# Altium PCB Arena2.1.PcbDoc
Units mm, origin at the board's own origin, x right, y up, seen from the top; angles counter-clockwise.
Board outline 78.11 x 75.18 mm, 2 copper layers (Top Layer, Bottom Layer); 17 components, 25 nets, 153 pads, 5 vias.
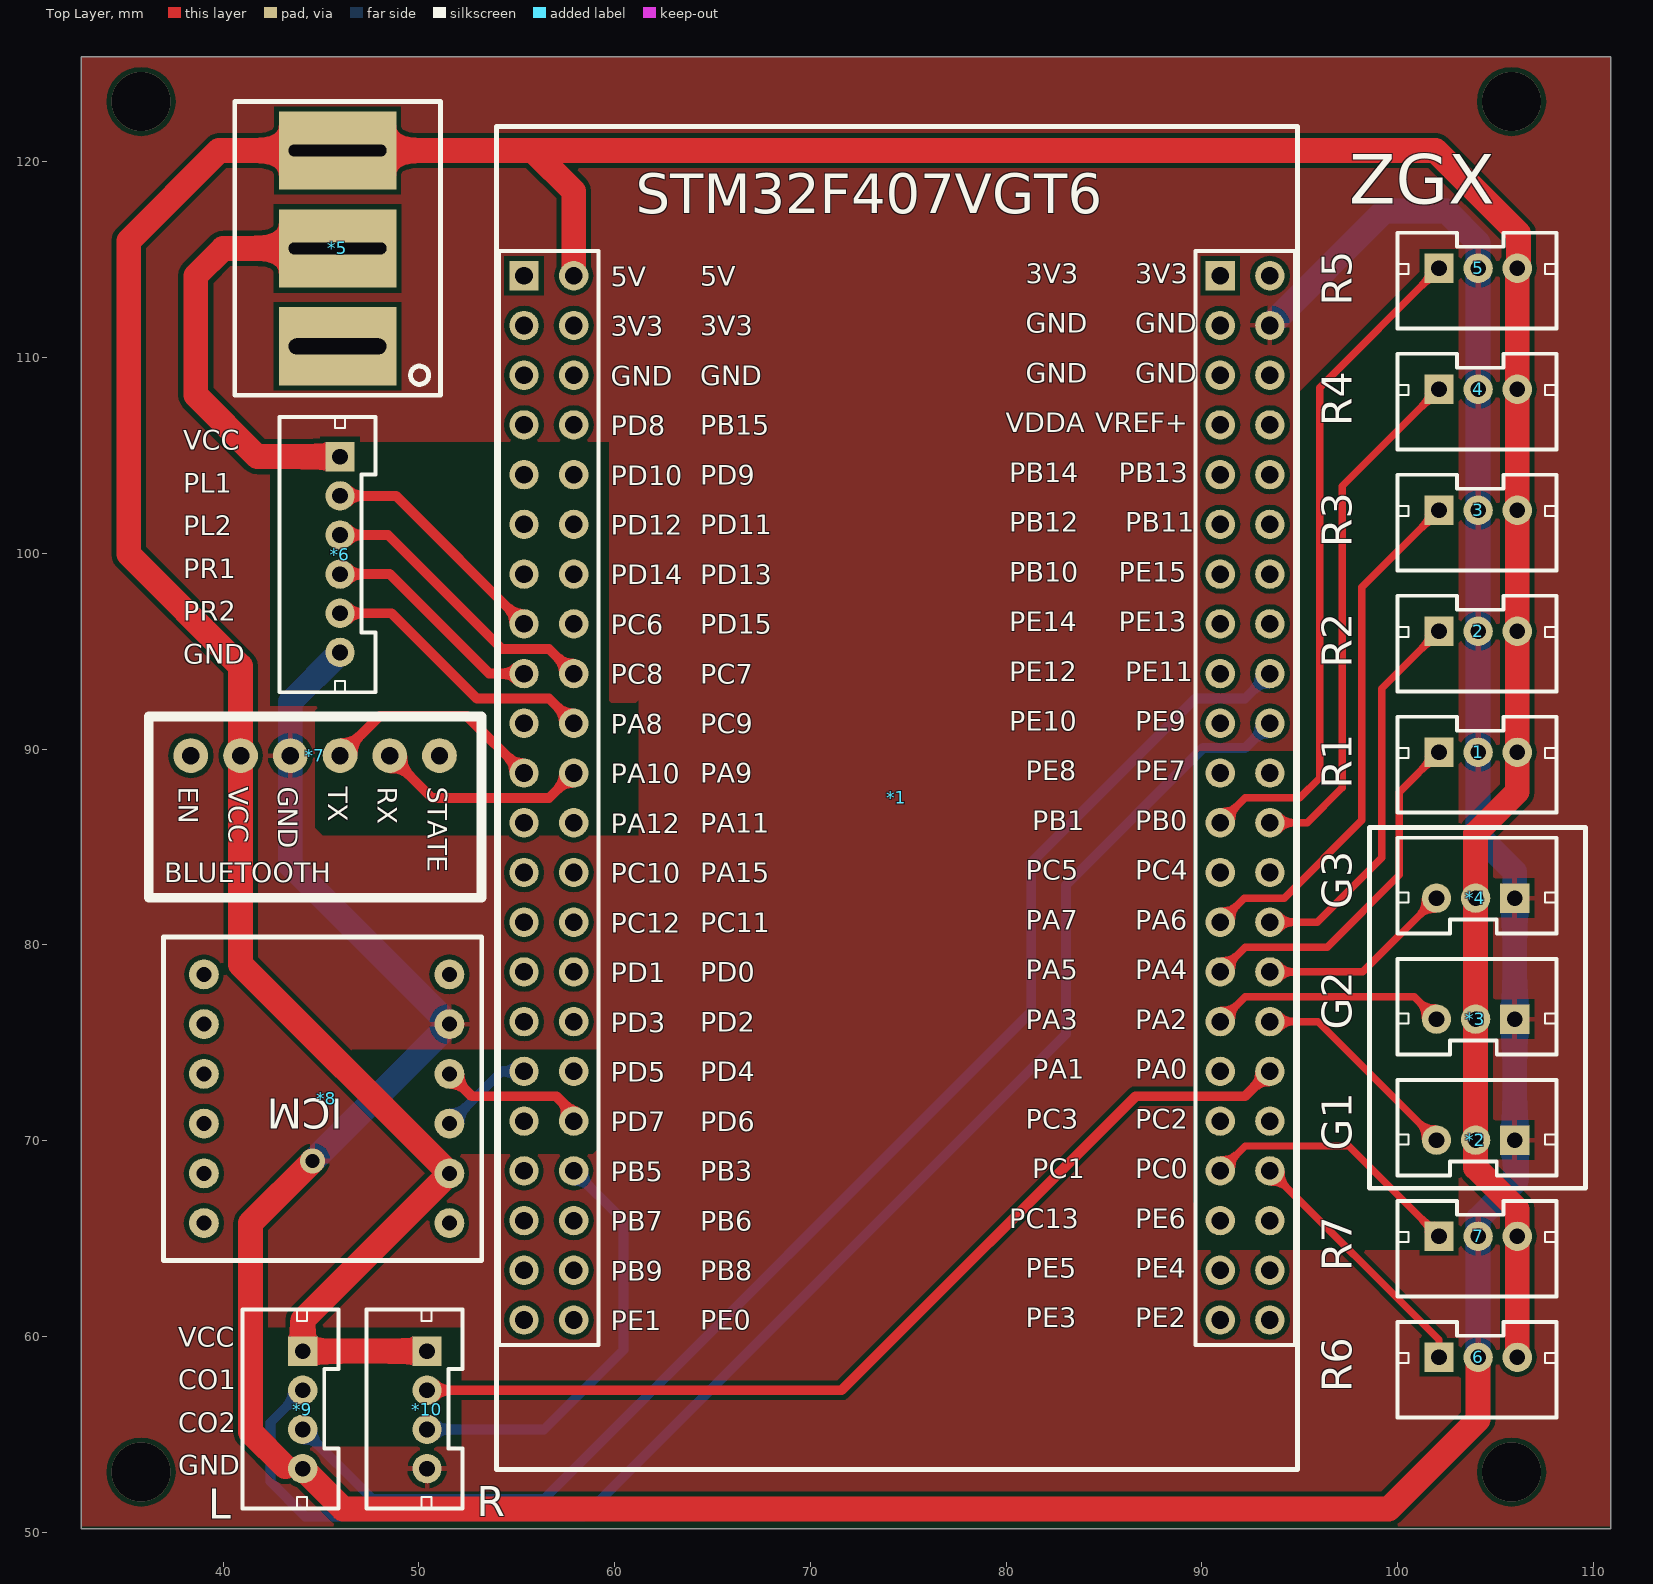
[diagram p0: Top Layer view]
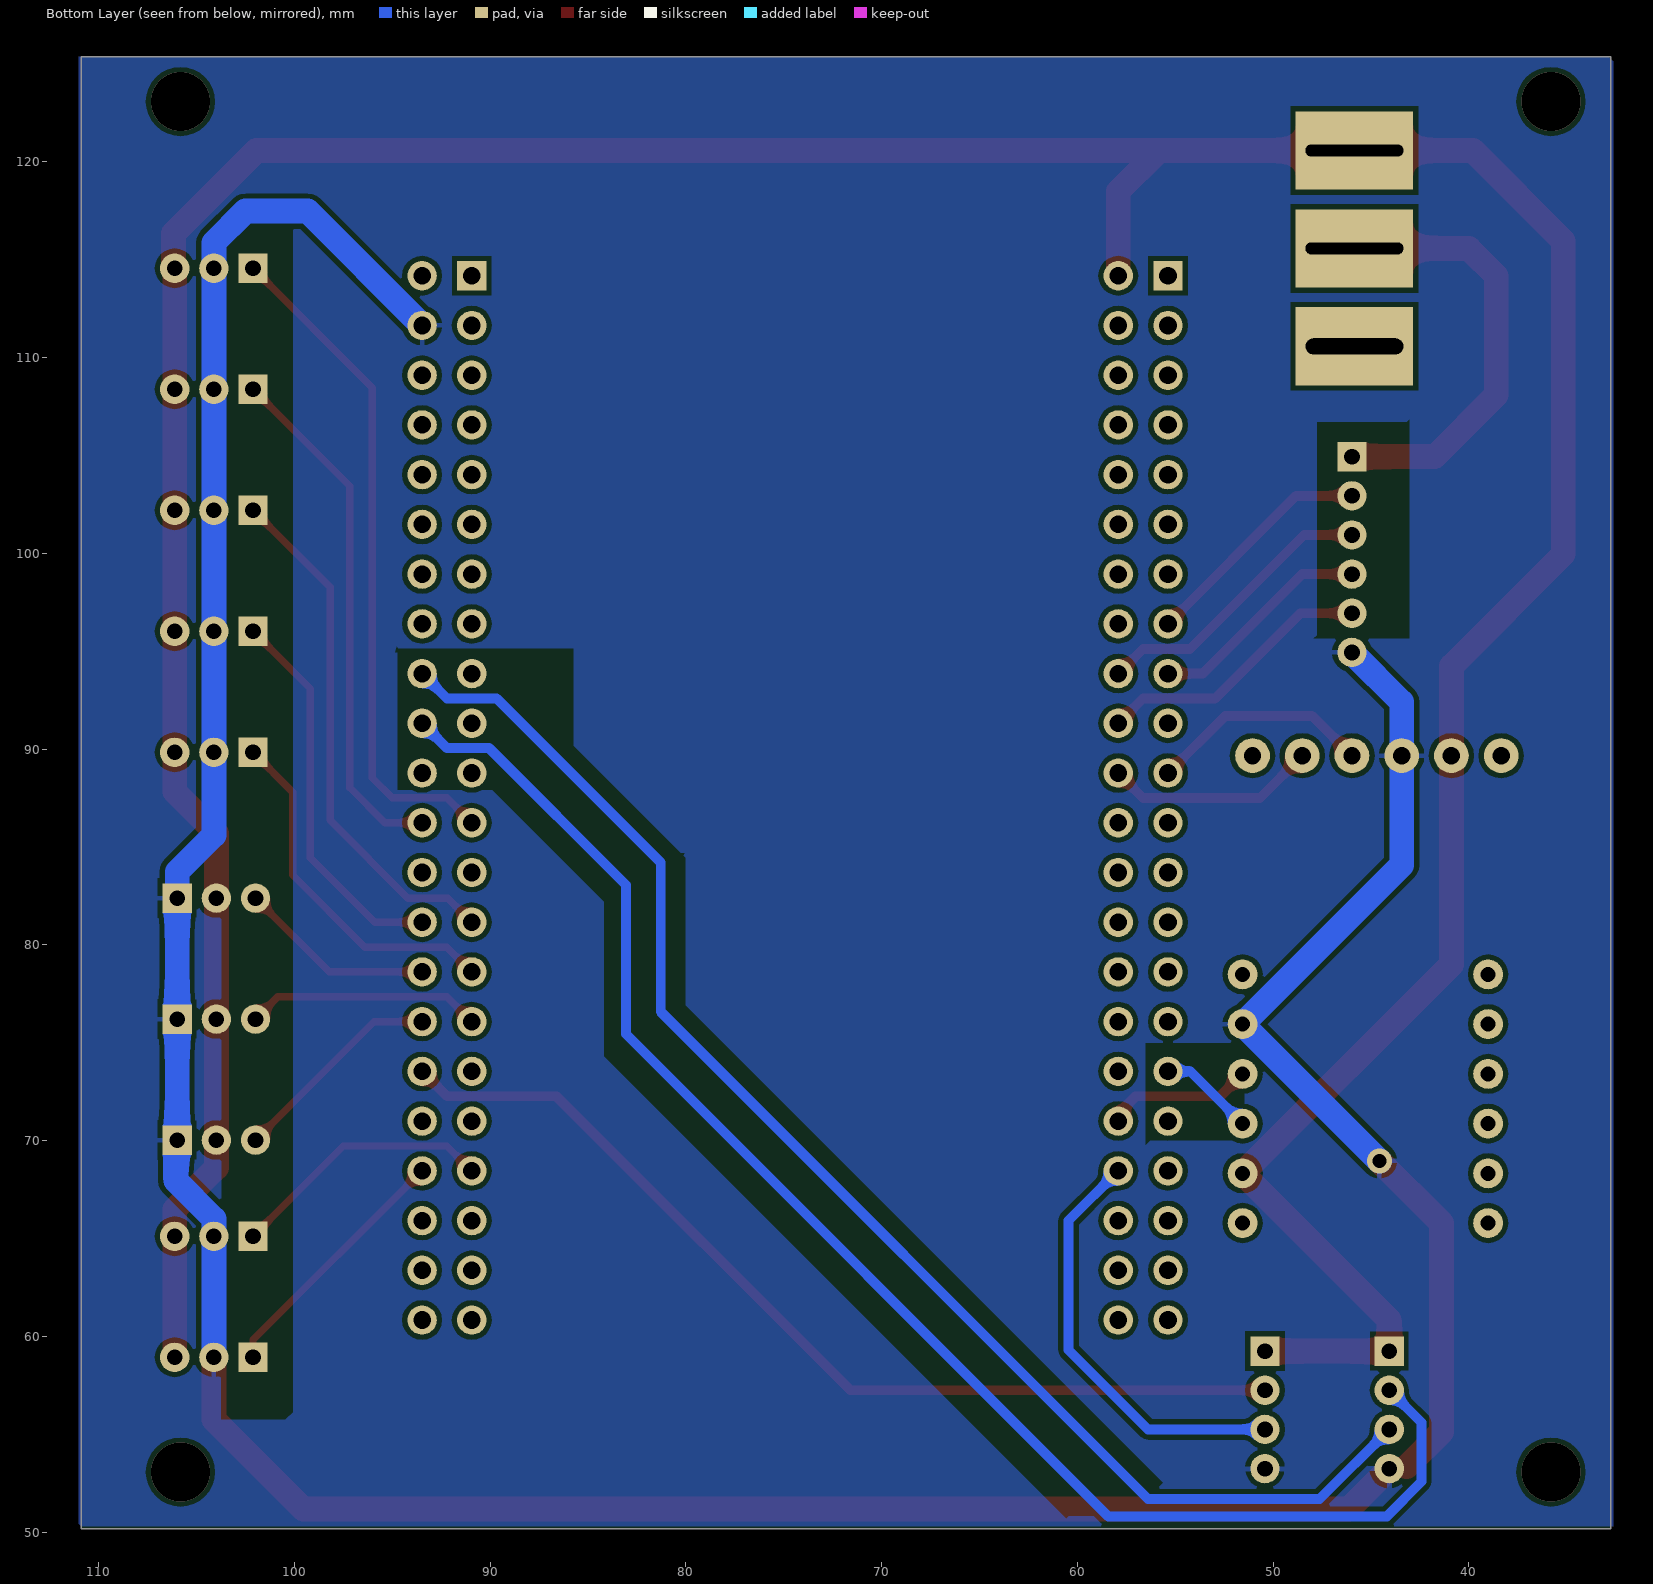
[diagram p1: Bottom Layer view, seen from below]

## Layer stack, top to bottom
Top Solder: solder mask 0.0102, Solder Resist, Dk 3.5
Top Layer: signal copper 0.0356
Dielectric 1: dielectric 0.32, FR-4, Dk 4.8
Bottom Layer: signal copper 0.0356
Bottom Solder: solder mask 0.0102, Solder Resist, Dk 3.5

## Board outline
32.766,81.026 32.766,125.349 110.871,125.349 110.871,50.165 32.766,50.165

## Design rules (kind name [scope] priority, off if disabled: settings)
Clearance [All] p1: gap=0.254 ignorepadtopadclearanceinfootprint=FALSE except(0: Arc-Hole Track-Hole SMDPad-Hole THPad-Hole Via-Hole Fill-Hole Poly-Hole Region-Hole Text-Hole)
PolygonConnect [All] p1: connectstyle=Relief reliefconductorwidth=0.254 reliefentries=4 polygonreliefangle="90 Angle" airgapwidth=0.254
RoutingVias [All] p1: holewidth=0.711 width=1.27 viastyle="Through Hole" minholewidth=0.711 minwidth=1.27 maxholewidth=0.711 maxwidth=1.27
SolderMaskExpansion [All] p1: expansion=0.102
Width [All] p1: maxlimit=254 minlimit=0.254 preferedwidth=0.254 toplayer_maxwidth=25.4 minimp=50.000000 maximp=50.000000 favimp=50.000000
30 further rules are at their usual default settings.

## Components (designator, comment, footprint, x,y, rotation, side; value= is the part's Value field where it differs from the comment)
1 "RANGING" PH2.0-L-Z-3P 102.108,89.831 r0 top
2 "RANGING" PH2.0-L-Z-3P 102.108,96.012 r0 top
3 "RANGING" PH2.0-L-Z-3P 102.108,102.193 r0 top
4 "RANGING" PH2.0-L-Z-3P 102.108,108.373 r0 top
5 "RANGING" PH2.0-L-Z-3P 102.108,114.554 r0 top
6 "RANGING" PH2.0-L-Z-3P 102.108,58.928 r0 top
7 "RANGING" PH2.0-L-Z-3P 102.108,65.109 r0 top
*1 "STM32F407VGT6" STM32F407VGT6 200.386,70.759 r0 top
*2 "Grayscale" PH2.0-L-Z-3P 105.98,70.021 r180 top
*3 "Grayscale" PH2.0-L-Z-3P 105.98,76.202 r180 top
*4 "Grayscale" PH2.0-L-Z-3P 105.98,82.383 r180 top
*5 "kaiguan" kaiguan 10.211,171.501 r180 top
*6 "MOTOR" PH2.0-L-Z-6P 45.974,104.933 r270 top
*7 "BLUETOOTH_1" bluetooth 9.093,63.576 r270 top
*8 "ICM" ICM 47.244,68.072 r180 top
*9 "ENCODE" PH2.0-L-Z-4P 44.069,59.245 r270 top
*10 "ENCODE" PH2.0-L-Z-4P 50.419,59.245 r270 top

## Footprints (in the part's own frame and the unit in brackets; to place one, negate y for a bottom-side part, rotate by r counter-clockwise, add the part's x,y. Pads: shape width x height; smd on the part's side, far side on the other; paste and mask are expansions set on the pad)
bluetooth [mil]
  round 70 hole 35: 1(-1027,1152) 2(-1027,1252) 3(-1027,1352) 4(-1027,1452) 5(-1027,1552) 6(-1027,1652)
  silkscreen extent -1106,1067 -741,1737
ICM [mil]
  round 60 hole 30: 1(-170,90) 2(-170,-10) 3(-170,-110) 4(-170,-210) 5(-170,-310) 6(-170,-410) 7(323.7,-410) 8(323.7,-310) 9(323.7,-210) 10(323.7,-110) 11(323.7,-10) 12(323.7,90)
  silkscreen extent -235,-485 405,165
kaiguan [mm]
  rect 6x4 hole 0.8 slot 5 at 0 deg: 1(-35.636,60.931)
  rect 6x4 hole 0.6 slot 5 at 0 deg: 2(-35.636,55.931) 3(-35.636,50.931)
  silkscreen extent -40.89,48.43 -30.39,63.43
PH2.0-L-Z-3P [mm] "PH2.0 3P立式直插 间距2mm        淘宝ID:黄晶宝石"
  rect 1.5x1.5 hole 0.8: 1(0,0)
  round 1.5 hole 0.8: 2(2,0) 3(4,0)
  silkscreen extent -2.13,-3.08 6,1.82, body extent -1.95,-3 5.95,1.7, height 6
PH2.0-L-Z-4P [mm] "PH2.0 4P立式直插 间距2mm        淘宝ID:黄晶宝石"
  rect 1.5x1.5 hole 0.8: 1(0,0)
  round 1.5 hole 0.8: 2(2,0) 3(4,0) 4(6,0)
  silkscreen extent -2.13,-3.08 8.03,1.82, body extent -1.98,-3 7.92,1.7, height 6
PH2.0-L-Z-6P [mm] "PH2.0 6P立式直插 间距2mm        淘宝ID:黄晶宝石"
  rect 1.5x1.5 hole 0.8: 1(0,0)
  round 1.5 hole 0.8: 2(2,0) 3(4,0) 4(6,0) 5(8,0) 6(10,0)
  silkscreen extent -2.03,-3.08 12.03,1.82, body extent -2,-2.92 11.9,1.78, height 6
STM32F407VGT6 [mm]
  round 1.5 hole 0.9: 1(-106.914,43.414) 2(-106.914,40.874) 3(-106.914,38.334) 4(-106.914,35.794) 5(-106.914,33.254) 6(-106.914,30.714) 7(-106.914,28.174) 8(-106.914,25.634) 9(-106.914,23.094) 10(-106.914,20.554) 11(-106.914,18.014) 12(-106.914,15.474) 13(-106.914,12.934) 14(-106.914,10.394) 15(-106.914,7.854) 16(-106.914,5.314) 17(-106.914,2.774) 18(-106.914,0.234) 19(-106.914,-2.306) 20(-106.914,-4.846) 21(-106.914,-7.386) 22(-106.914,-9.926) 23(-109.454,-9.926) 24(-109.454,-7.386) 25(-109.454,-4.846) 26(-109.454,-2.306) 27(-109.454,0.234) 28(-109.454,2.774) 29(-109.454,5.314) 30(-109.454,7.854) 31(-109.454,10.394) 32(-109.454,12.934) 33(-109.454,15.474) 34(-109.454,18.014) 35(-109.454,20.554) 36(-109.454,23.094) 37(-109.454,25.634) 38(-109.454,28.174) 39(-109.454,30.714) 40(-109.454,33.254) 41(-109.454,35.794) 42(-109.454,38.334) 43(-109.454,40.874) 46(-145.014,40.874) 47(-145.014,38.334) 48(-145.014,35.794) 49(-145.014,33.254) 50(-145.014,30.714) 51(-145.014,28.174) 52(-145.014,25.634) 53(-145.014,23.094) 54(-145.014,20.554) 55(-145.014,18.014) 56(-145.014,15.474) 57(-145.014,12.934) 58(-145.014,10.394) 59(-145.014,7.854) 60(-145.014,5.314) 61(-145.014,2.774) 62(-145.014,0.234) 63(-145.014,-2.306) 64(-145.014,-4.846) 65(-145.014,-7.386) 66(-145.014,-9.926) 67(-142.474,-9.926) 68(-142.474,-7.386) 69(-142.474,-4.846) 70(-142.474,-2.306) 71(-142.474,0.234) 72(-142.474,2.774) 73(-142.474,5.314) 74(-142.474,7.854) 75(-142.474,10.394) 76(-142.474,12.934) 77(-142.474,15.474) 78(-142.474,18.014) 79(-142.474,20.554) 80(-142.474,23.094) 81(-142.474,25.634) 82(-142.474,28.174) 83(-142.474,30.714) 84(-142.474,33.254) 85(-142.474,35.794) 86(-142.474,38.334) 87(-142.474,40.874) 88(-142.474,43.414)
  rect 1.5x1.5 hole 0.9: 44(-109.454,43.414) 45(-145.014,43.414)
  silkscreen extent -146.41,-17.55 -105.52,51.04, body extent -143.51,59.94 -143.51,59.94, height 0.25

## Via types
v1: diameter 3, hole 3, Top Layer to Bottom Layer, 4 vias
v2: diameter 1.27, hole 0.711, Top Layer to Bottom Layer, tented both sides, 1 vias

## Nets (pads, with @x,y where several pads share a name; then routed paths per layer and width w, separated by ;. In a path a pad name is that pad's centre, name@x,y a point inside that pad or via, vN(x,y) a via of type N, cw(c..) or ccw(c..) an arc to the next point about the centre after c; other vN are vias at no path point)
5V: 1.3 2.3 3.3 4.3 5.3 6.3 7.3 *1.88 *2.2 *3.2 *4.2 *5.3 *7.2 *8.2 *9.1 *10.1 | length 214.1
  Top Layer w1.27: *10.1 *9.1 44.069,60.833 *8.2 40.894,78.994 *7.2 40.894,94.234 35.179,99.949 35.179,115.951 39.798,120.57 *5.3 55.833,120.57 ; *1.88 57.912,118.491 55.833,120.57 ; 6.3 7.3 106.108,66.485 103.98,68.613 *2.2 *3.2 *4.2 103.98,85.692 106.108,87.82 1.3 2.3 3.3 4.3 5.3 106.172,114.618 106.172,116.332 101.934,120.57 55.833,120.57
BT_RX: *1.78 *7.5 | length 10.8
  Top Layer w0.508: *7.5 50.673,87.503 56.642,87.503 *1.78
BT_TX: *1.55 *7.4 | length 11.4
  Top Layer w0.508: *7.4 48.006,91.694 52.451,91.694 *1.55
Encode_L1: *1.10 *9.2 | length 78.4
  Bottom Layer w0.508: *9.2 42.418,55.594 42.418,52.578 44.196,50.8 58.42,50.8 83.058,75.438 83.058,83.058 90.043,90.043 92.202,90.043 *1.10
Encode_L2: *1.9 *9.3 | length 72.8
  Bottom Layer w0.508: *9.3 47.625,51.689 56.388,51.689 81.28,76.581 81.28,84.201 89.662,92.583 92.202,92.583 *1.9
Encode_R1: *1.17 *10.2 | length 49.8
  Top Layer w0.508: *10.2 71.596,57.245 86.614,72.263 92.202,72.263 *1.17
Encode_R2: *1.70 *10.3 | length 21.9
  Bottom Layer w0.508: *10.3 56.388,55.245 60.452,59.309 60.452,65.913 *1.70
GND: 1.2 2.2 3.2 4.2 5.2 6.2 7.2 *1.2 *2.1 *3.1 *4.1 *6.6 *7.3 *8.5 *9.4 *10.4 | length 189.2
  Top Layer w1.27: 43.18,53.34 41.402,55.118 41.402,65.786 v2(44.577,68.961) ; *9.4 46.133,51.181 99.536,51.181 104.108,55.753 6.2
  Bottom Layer w1.27: v2(44.577,68.961) *8.5 43.434,84.074 *7.3 43.434,92.393 *6.6 ; *1.2 99.314,117.475 102.489,117.475 104.108,115.856 5.2 4.2 3.2 2.2 1.2 104.108,85.598 105.98,83.726 *4.1 *3.1 *2.1 106.045,69.956 106.045,67.945 104.108,66.008 7.2 6.2
Gray1: *1.16 *2.3 | length 11
  Top Layer w0.381: *1.16 95.928,76.073 *2.3
Gray2: *1.29 *3.3 | length 12
  Top Layer w0.381: *1.29 92.202,77.343 100.839,77.343 *3.3
Gray3: *1.15 *4.3 | length 10.1
  Top Layer w0.381: *1.15 98.21,78.613 *4.3
ICM_RX: *1.61 *8.3 | length 4.9
  Bottom Layer w0.508: *8.3 54.229,73.533 *1.61
ICM_TX: *1.71 *8.4 | length 7.6
  Top Layer w0.508: *8.4 52.705,72.263 57.023,72.263 57.912,71.374 *1.71
Net*5_2: *5.2 *6.1 | length 22.6
  Top Layer w1.27: *5.2 40.005,115.57 38.608,114.173 38.608,108.077 41.752,104.933 *6.1
PWM_L1: *1.52 *6.2 | length 12.1
  Top Layer w0.508: *6.2 48.832,102.933 *1.52
PWM_L2: *1.80 *6.3 | length 14.9
  Top Layer w0.508: *6.3 48.419,100.933 54.241,95.111 56.654,95.111 *1.80
PWM_R1: *1.53 *6.4 | length 11.5
  Top Layer w0.508: *6.4 48.514,98.933 53.594,93.853 *1.53
PWM_R2: *1.79 *6.5 | length 14.3
  Top Layer w0.508: *6.5 48.609,96.933 52.959,92.583 56.642,92.583 *1.79
Range1: 1.1 *1.30 | length 18.3
  Top Layer w0.381: *1.30 92.202,79.883 96.393,79.883 100.076,83.566 100.076,87.799 1.1
Range2: 2.1 *1.14 | length 19.8
  Top Layer w0.381: *1.14 95.885,81.153 99.187,84.455 99.187,93.091 2.1
Range3: 3.1 *1.31 | length 26.9
  Top Layer w0.381: *1.31 92.162,82.383 94.194,82.383 98.171,86.36 98.171,98.256 3.1
Range4: 4.1 *1.12 | length 26.8
  Top Layer w0.381: *1.12 95.377,86.233 97.155,88.011 97.155,103.42 4.1
Range5: 5.1 *1.33 | length 34.6
  Top Layer w0.381: *1.33 92.202,87.503 94.996,87.503 96.012,88.519 96.012,108.458 5.1
Range6: 6.1 *1.19 | length 13.1
  Top Layer w0.381: *1.19 102.108,59.817 6.1
Range7: 7.1 *1.26 | length 13.6
  Top Layer w0.381: *1.26 92.202,69.723 97.494,69.723 7.1
pads on no net: *1.1 *1.3 *1.4 *1.5 *1.6 *1.7 *1.8 *1.11 *1.13 *1.18 *1.20 *1.21 *1.22 *1.23 *1.24 *1.25 *1.27 *1.28 *1.32 *1.34 *1.35 *1.36 *1.37 *1.38 *1.39 *1.40 *1.41 *1.42 *1.43 *1.44 *1.45 *1.46 *1.47 *1.48 *1.49 *1.50 *1.51 *1.54 *1.56 *1.57 *1.58 *1.59 *1.60 *1.62 *1.63 *1.64 *1.65 *1.66 *1.67 *1.68 *1.69 *1.72 *1.73 *1.74 *1.75 *1.76 *1.77 *1.81 *1.82 *1.83 *1.84 *1.85 *1.86 *1.87 *5.1 *7.1 *7.6 *8.1 *8.6 *8.7 *8.8 *8.9 *8.10 *8.11 *8.12
copper on no net:
  other v1: 35.814,53.07 105.814,53.07 35.814,123.07 105.814,123.07

## Polygon pours and split planes (outlines as drawn)
GND on Top Layer "Top Layer-GND" (solid, pour order 0): 32.766,125.349 32.766,50.292 110.871,50.292 110.871,125.349
GND on Bottom Layer "Bottom Layer-GND" (solid, pour order 2): 32.766,125.349 32.639,125.222 32.639,50.292 110.871,50.292 110.998,50.419 110.998,125.349 32.893,125.349 32.766,125.222

## Other copper
Top Layer:
  pour cut-out: 46.504,74.549 46.631,74.676 59.182,74.676 59.182,69.596 58.893,69.307 51.747,69.307
  pour cut-out: 42.291,60.475 52.197,60.475 52.197,54.049 51.89,54.356 42.164,54.356 42.164,60.516 42.037,60.643
  pour cut-out: 89.535,66.844 89.662,66.717 89.662,64.386 102.991,64.386 103.112,64.507 103.112,115.156 101.887,115.156 94.869,108.138 94.869,89.916 89.882,89.916 89.535,89.569
  pour cut-out: 45.085,92.329 44.704,91.948 44.704,85.979 45.085,85.598 61.214,85.598 61.214,92.456 61.087,92.329
  pour cut-out: 42.037,105.874 42.418,105.493 42.418,92.202 59.944,92.202 59.69,92.456 59.69,105.676 42.277,105.676 42.123,105.83
  pour cut-out: 46.978,105.937
Bottom Layer:
  pour cut-out: 103.251,116.304 103.096,116.459 100.076,116.459 100.076,56.134 100.457,55.753 103.718,55.753 103.718,115.643 103.505,115.856
  pour cut-out: 80.264,84.709 80.01,84.455 80.01,76.913 55.626,52.529 57.355,50.8 60.452,50.8 60.579,50.673 84.201,74.295 84.201,82.207 84.377,82.383 82.088,84.671 80.01,84.671
  pour cut-out: 51.587,74.93 51.478,74.82 51.478,70.021 56.288,70.021 56.515,69.794 56.515,74.965 51.444,74.965 51.435,74.956
  pour cut-out: 43.053,106.815 43.053,95.649 47.92,95.649 47.752,95.817 47.752,106.68 43.188,106.68
  pour cut-out: 94.869,94.941 94.675,95.135 85.725,95.135 85.725,90.17 80.264,84.709 82.59,82.383 84.377,82.383 89.89,87.896 94.742,87.896 94.742,95.377

## Silkscreen, mask and mechanical layers (free items; w line width, h text height)
Top Overlay:
  lines w0.254: 98.552,67.564 98.552,85.979 109.601,85.979 109.601,67.564 98.552,67.564
  text "ZGX" at 97.536,117.856 h2.54
  text "R5" at 97.663,112.649 h1.52 r90
  text "R4" at 97.663,106.482 h1.52 r90
  text "VCC" at 37.973,105.283 h1.02
  text "PL1" at 37.973,103.099 h1.02
  text "PL2" at 37.973,100.914 h1.02
  text "R3" at 97.663,100.316 h1.52 r90
  text "PR1" at 37.973,98.73 h1.02
  text "PR2" at 37.973,96.545 h1.02
  text "GND" at 37.973,94.361 h1.02
  text "R2" at 97.663,94.149 h1.52 r90
  text "R1" at 97.663,87.983 h1.52 r90
  text "G3" at 97.663,81.816 h1.52 r90
  text "G2" at 97.663,75.65 h1.52 r90
  text "G1" at 97.663,69.483 h1.52 r90
  text "R7" at 97.663,63.317 h1.52 r90
  text "VCC" at 37.719,59.468 h1.02
  text "CO1" at 37.719,57.291 h1.02
  text "R6" at 97.663,57.15 h1.52 r90
  text "CO2" at 37.719,55.113 h1.02
  text "GND" at 37.719,52.936 h1.02
  text "R" at 52.959,50.8 h1.52
  text "L" at 39.243,50.673 h1.52
Mechanical 1:
  the board outline again, w0.254

## Text inside footprints (layer, text, board x,y; h text height)
*1: Top Overlay "3V3" at 81.006,113.792 h1.02; Top Overlay "3V3" at 86.593,113.792 h1.02; Top Overlay "GND" at 81.006,111.252 h1.02; Top Overlay "GND" at 86.593,111.252 h1.02; Top Overlay "GND" at 81.006,108.712 h1.02; Top Overlay "GND" at 86.593,108.712 h1.02; Top Overlay "VDDA" at 79.99,106.172 h1.02; Top Overlay "VREF+" at 84.562,106.172 h1.02; Top Overlay "PB14" at 80.159,103.632 h1.02; Top Overlay "PB13" at 85.747,103.632 h1.02; Top Overlay "PB12" at 80.159,101.092 h1.02; Top Overlay "PB11" at 86.085,101.092 h1.02; Top Overlay "PB10" at 80.159,98.552 h1.02; Top Overlay "PE15" at 85.747,98.552 h1.02; Top Overlay "PE14" at 80.159,96.012 h1.02; Top Overlay "PE13" at 85.747,96.012 h1.02; Top Overlay "PE12" at 80.159,93.472 h1.02; Top Overlay "PE11" at 86.085,93.472 h1.02; Top Overlay "PE10" at 80.159,90.932 h1.02; Top Overlay "PE9" at 86.593,90.932 h1.02; Top Overlay "PE8" at 81.006,88.392 h1.02; Top Overlay "PE7" at 86.593,88.392 h1.02; Top Overlay "PB1" at 81.344,85.852 h1.02; Top Overlay "PB0" at 86.593,85.852 h1.02; Top Overlay "PC5" at 81.006,83.312 h1.02; Top Overlay "PC4" at 86.593,83.312 h1.02; Top Overlay "PA7" at 81.006,80.772 h1.02; Top Overlay "PA6" at 86.593,80.772 h1.02; Top Overlay "PA5" at 81.006,78.232 h1.02; Top Overlay "PA4" at 86.593,78.232 h1.02; Top Overlay "PA3" at 81.006,75.692 h1.02; Top Overlay "PA2" at 86.593,75.692 h1.02; Top Overlay "PA1" at 81.344,73.152 h1.02; Top Overlay "PA0" at 86.593,73.152 h1.02; Top Overlay "PC3" at 81.006,70.612 h1.02; Top Overlay "PC2" at 86.593,70.612 h1.02; Top Overlay "PC1" at 81.344,68.072 h1.02; Top Overlay "PC0" at 86.593,68.072 h1.02; Top Overlay "PC13" at 80.159,65.532 h1.02; Top Overlay "PE6" at 86.593,65.532 h1.02; Top Overlay "PE5" at 81.006,62.992 h1.02; Top Overlay "PE4" at 86.593,62.992 h1.02; Top Overlay "PE3" at 81.006,60.452 h1.02; Top Overlay "PE2" at 86.593,60.452 h1.02; Top Overlay "PE0" at 64.369,60.325 h1.02; Top Overlay "PE1" at 59.797,60.305 h1.02; Top Overlay "PB8" at 64.369,62.865 h1.02; Top Overlay "PB9" at 59.797,62.845 h1.02; Top Overlay "PB6" at 64.369,65.405 h1.02; Top Overlay "PB7" at 59.797,65.385 h1.02; Top Overlay "PB3" at 64.369,67.945 h1.02; Top Overlay "PB5" at 59.797,67.925 h1.02; Top Overlay "PD6" at 64.369,70.485 h1.02; Top Overlay "PD7" at 59.797,70.465 h1.02; Top Overlay "PD4" at 64.369,73.025 h1.02; Top Overlay "PD5" at 59.797,73.005 h1.02; Top Overlay "PD2" at 64.369,75.565 h1.02; Top Overlay "PD3" at 59.797,75.545 h1.02; Top Overlay "PD0" at 64.369,78.105 h1.02; Top Overlay "PD1" at 59.797,78.085 h1.02; Top Overlay "PC11" at 64.369,80.645 h1.02; Top Overlay "PC12" at 59.797,80.625 h1.02; Top Overlay "PA15" at 64.369,83.185 h1.02; Top Overlay "PC10" at 59.797,83.165 h1.02; Top Overlay "PA11" at 64.369,85.725 h1.02; Top Overlay "PA12" at 59.797,85.705 h1.02; Top Overlay "PA9" at 64.369,88.265 h1.02; Top Overlay "PA10" at 59.797,88.245 h1.02; Top Overlay "PC9" at 64.369,90.805 h1.02; Top Overlay "PA8" at 59.797,90.785 h1.02; Top Overlay "PC7" at 64.369,93.345 h1.02; Top Overlay "PC8" at 59.797,93.325 h1.02; Top Overlay "PD15" at 64.369,95.885 h1.02; Top Overlay "PC6" at 59.797,95.865 h1.02; Top Overlay "PD13" at 64.369,98.425 h1.02; Top Overlay "PD14" at 59.797,98.405 h1.02; Top Overlay "PD11" at 64.369,100.965 h1.02; Top Overlay "PD12" at 59.797,100.945 h1.02; Top Overlay "PD9" at 64.369,103.505 h1.02; Top Overlay "PD10" at 59.797,103.485 h1.02; Top Overlay "PB15" at 64.369,106.045 h1.02; Top Overlay "PD8" at 59.797,106.025 h1.02; Top Overlay "GND" at 64.369,108.585 h1.02; Top Overlay "GND" at 59.797,108.565 h1.02; Top Overlay "3V3" at 64.369,111.125 h1.02; Top Overlay "3V3" at 59.797,111.105 h1.02; Top Overlay "5V" at 64.369,113.665 h1.02; Top Overlay "5V" at 59.797,113.645 h1.02
*7: Top Overlay "EN" at 37.744,88.062 h1.02 r270; Top Overlay "VCC" at 40.284,88.062 h1.02 r270; Top Overlay "GND" at 42.824,88.062 h1.02 r270; Top Overlay "TX" at 45.364,88.062 h1.02 r270; Top Overlay "RX" at 47.904,88.062 h1.02 r270; Top Overlay "STATE" at 50.444,88.062 h1.02 r270; Top Overlay "BLUETOOTH" at 37.008,83.185 h1.02